# EAGLE board Fiação MR21 v5 (EAGLE 9.7.0)
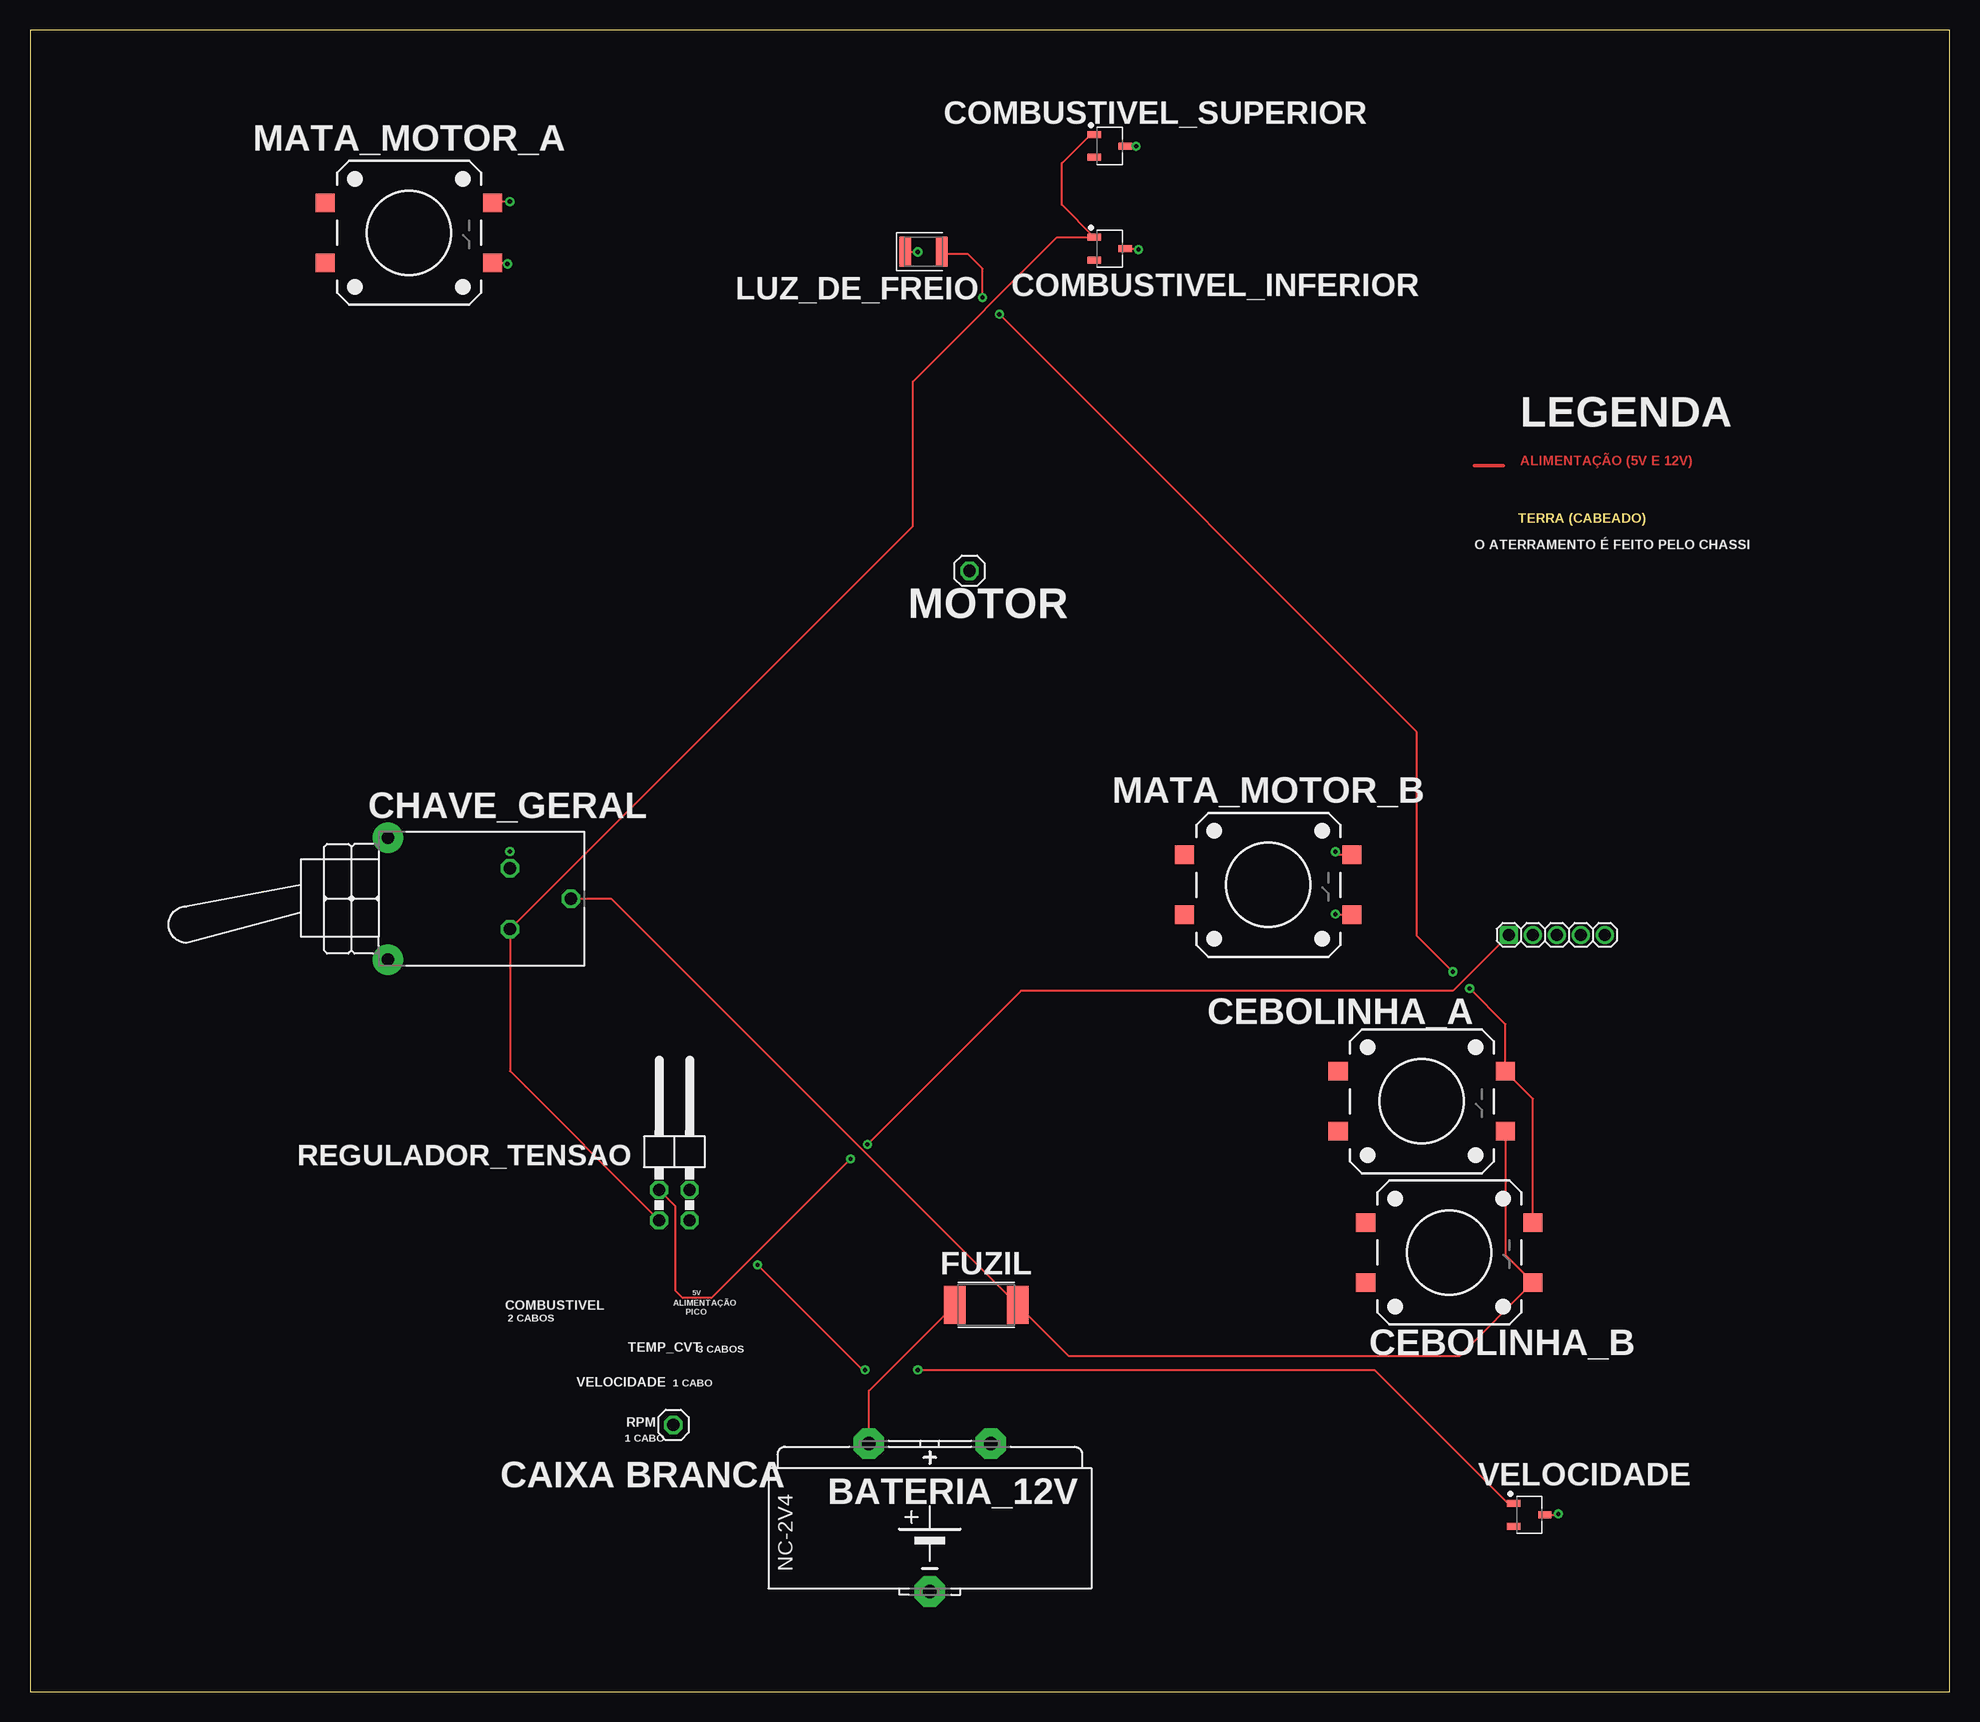
[diagram p0: board, top side]
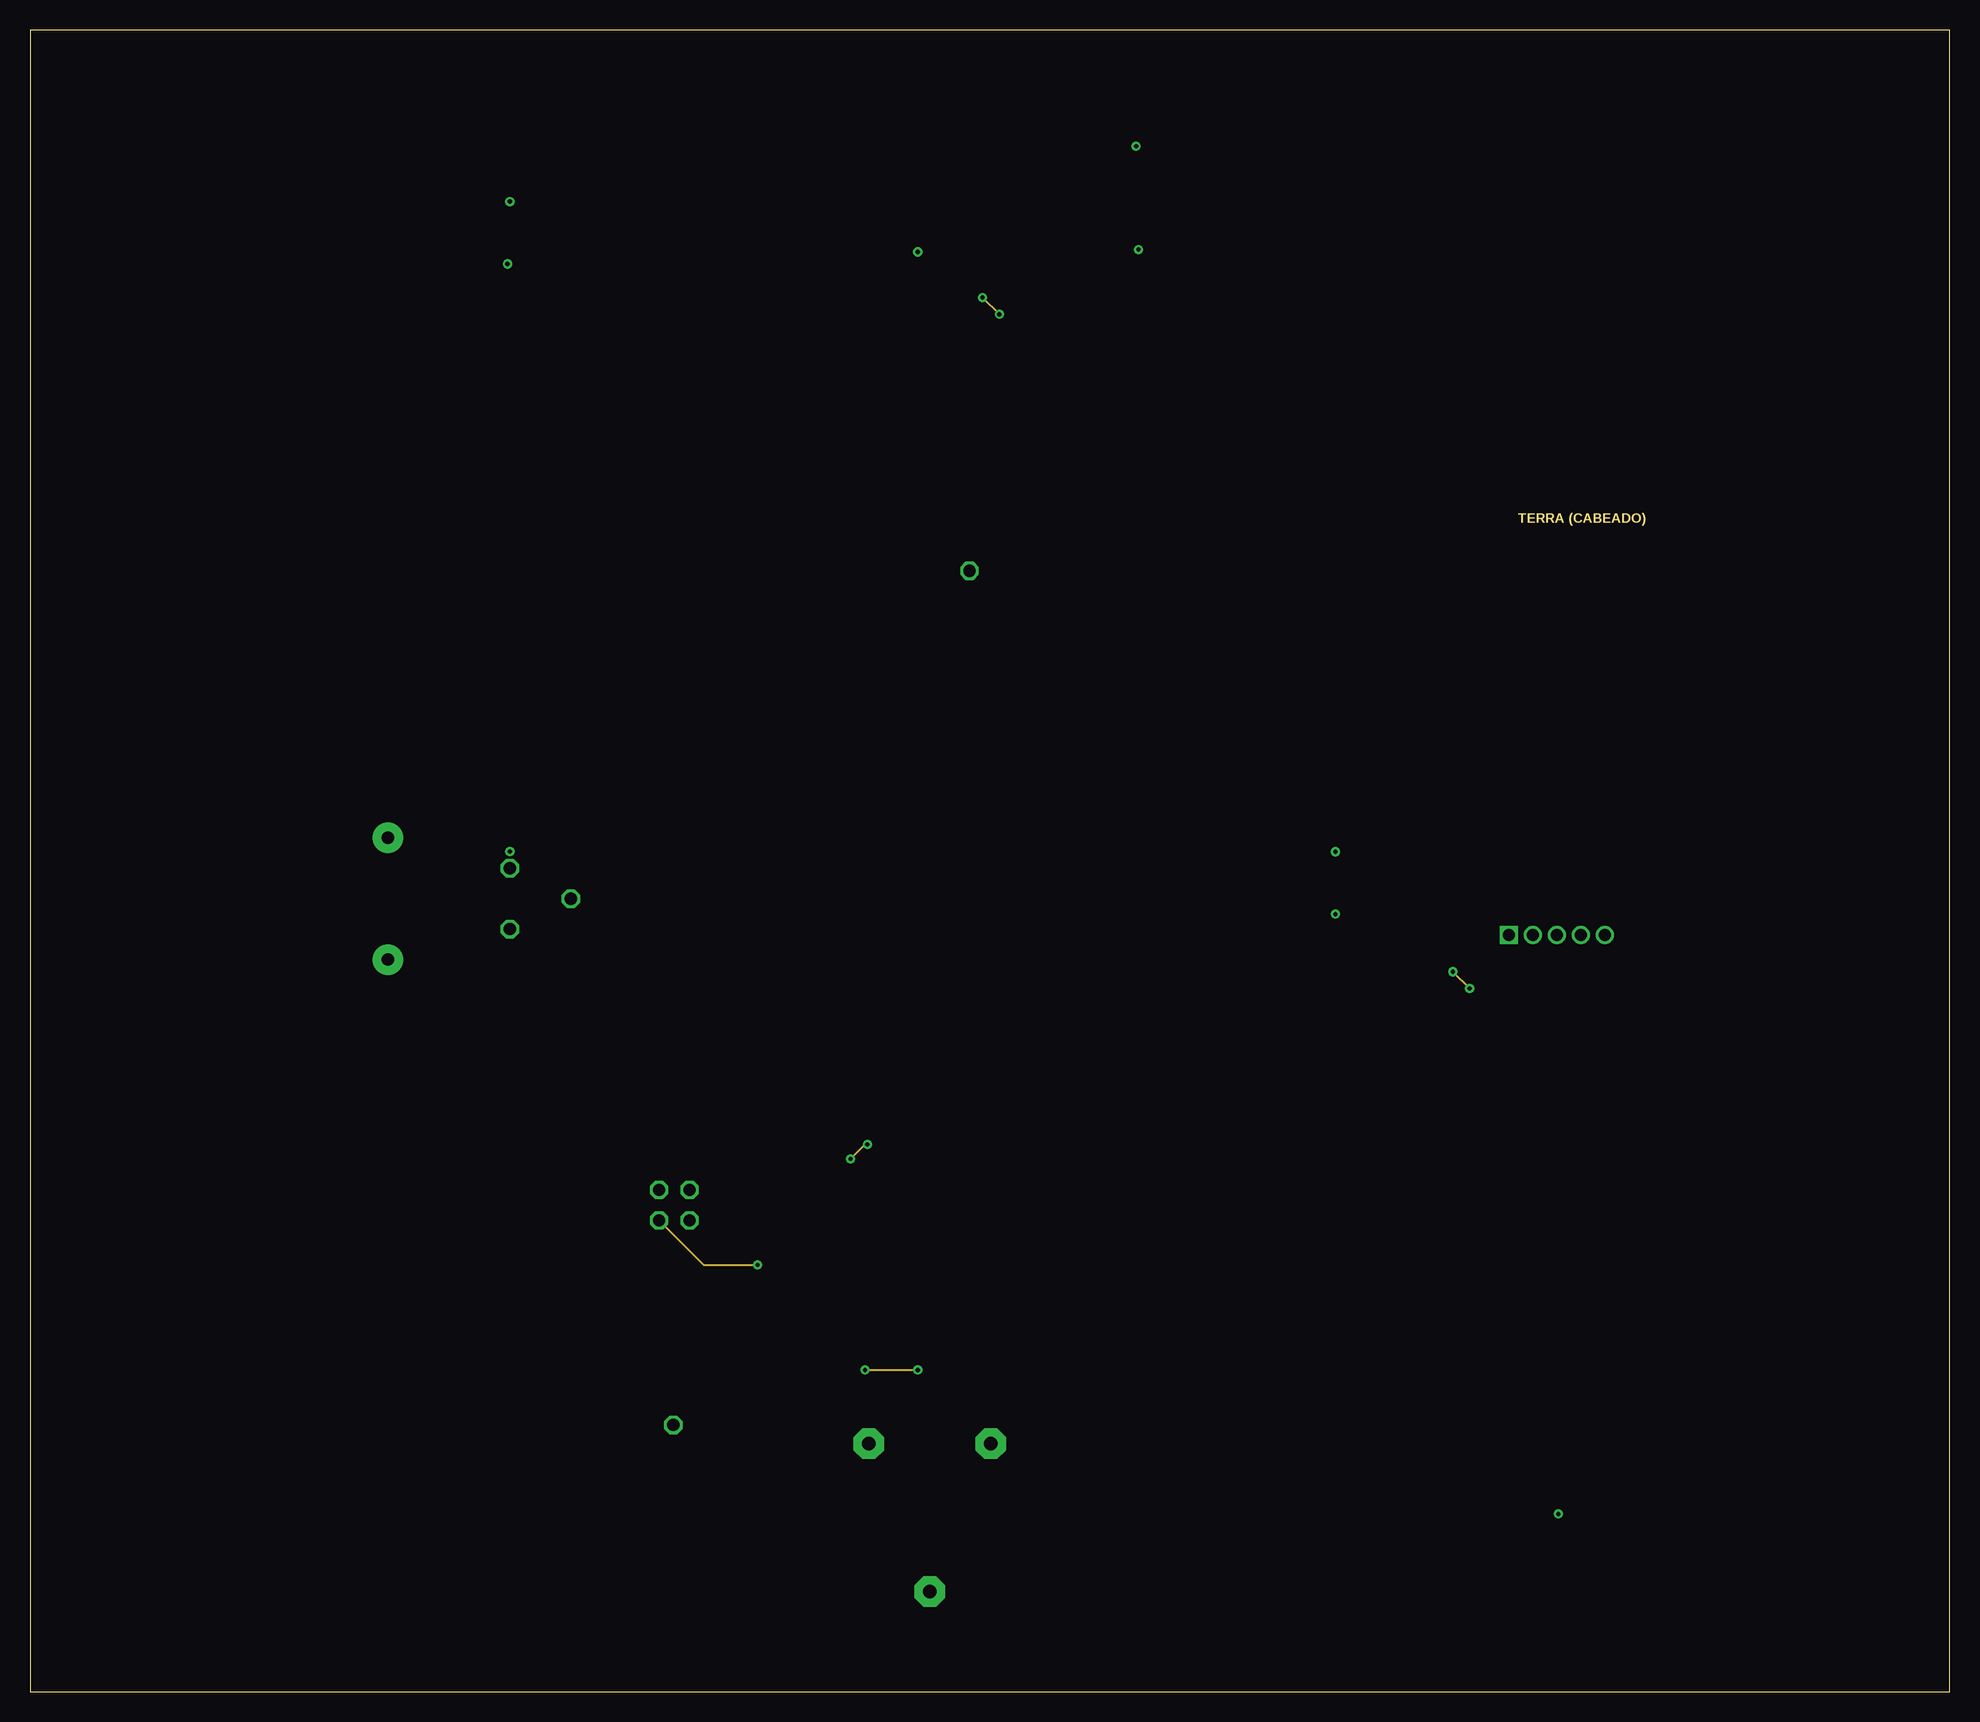
[diagram p1: board, inner layer Top2(Alimentação)]
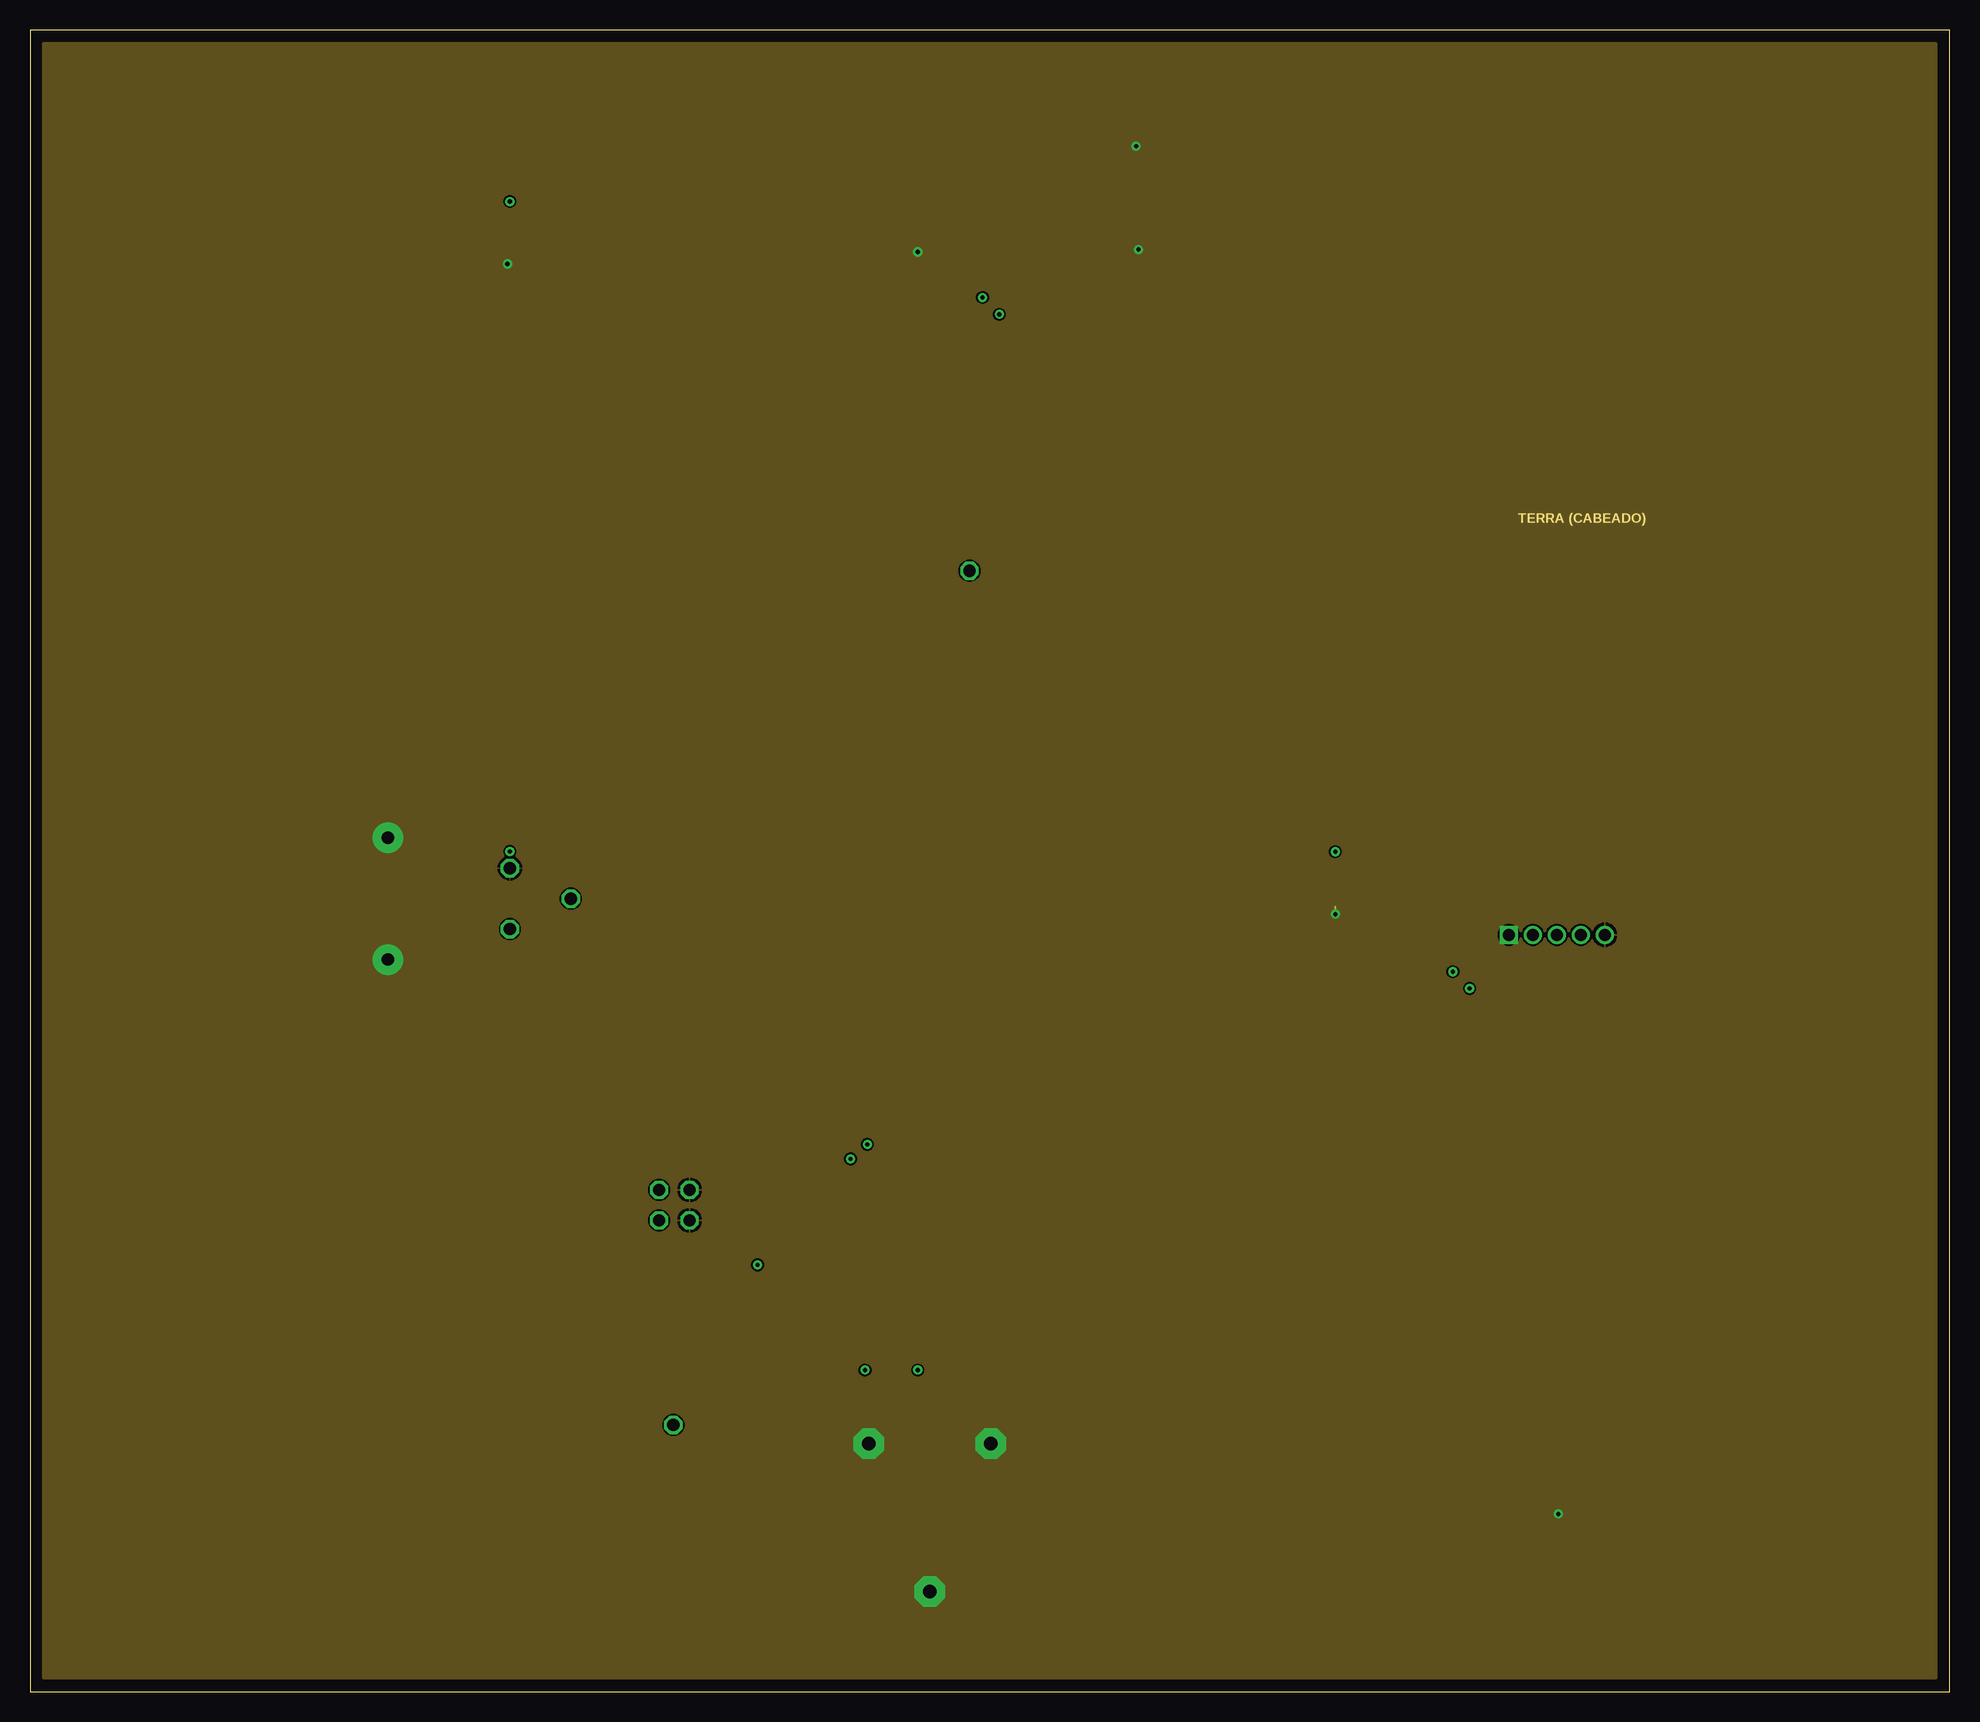
[diagram p2: board, inner layer GROUND-CHASSI]
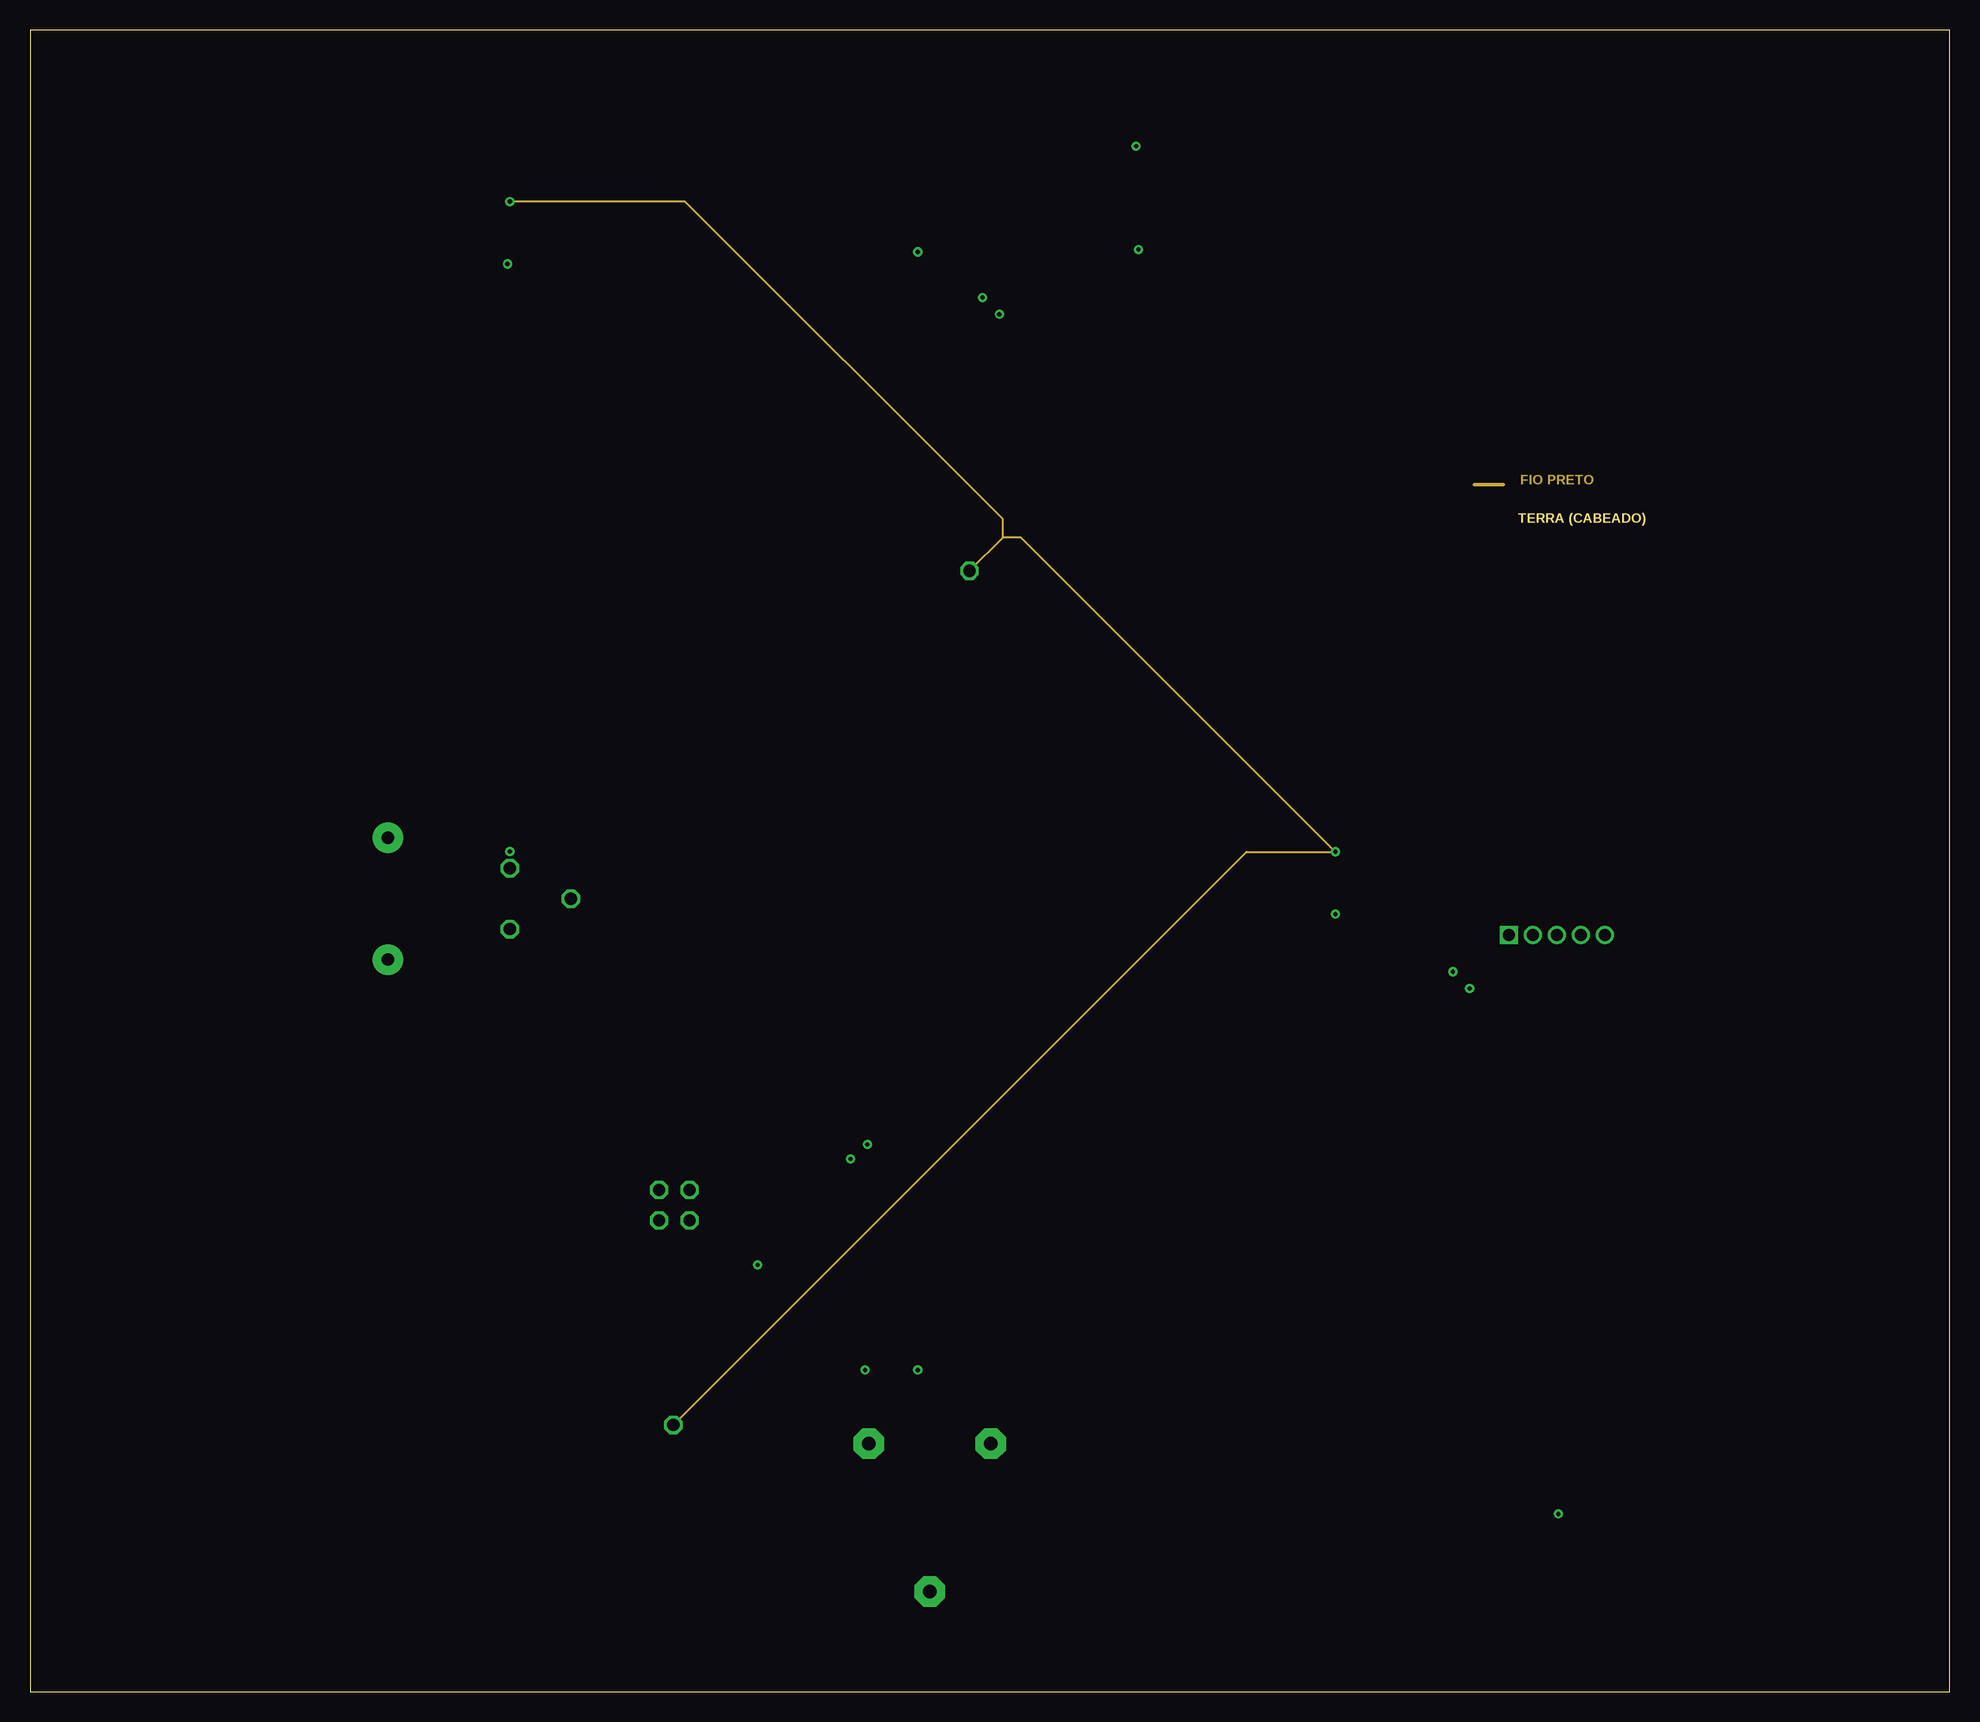
[diagram p3: board, inner layer FIO_PRETO]
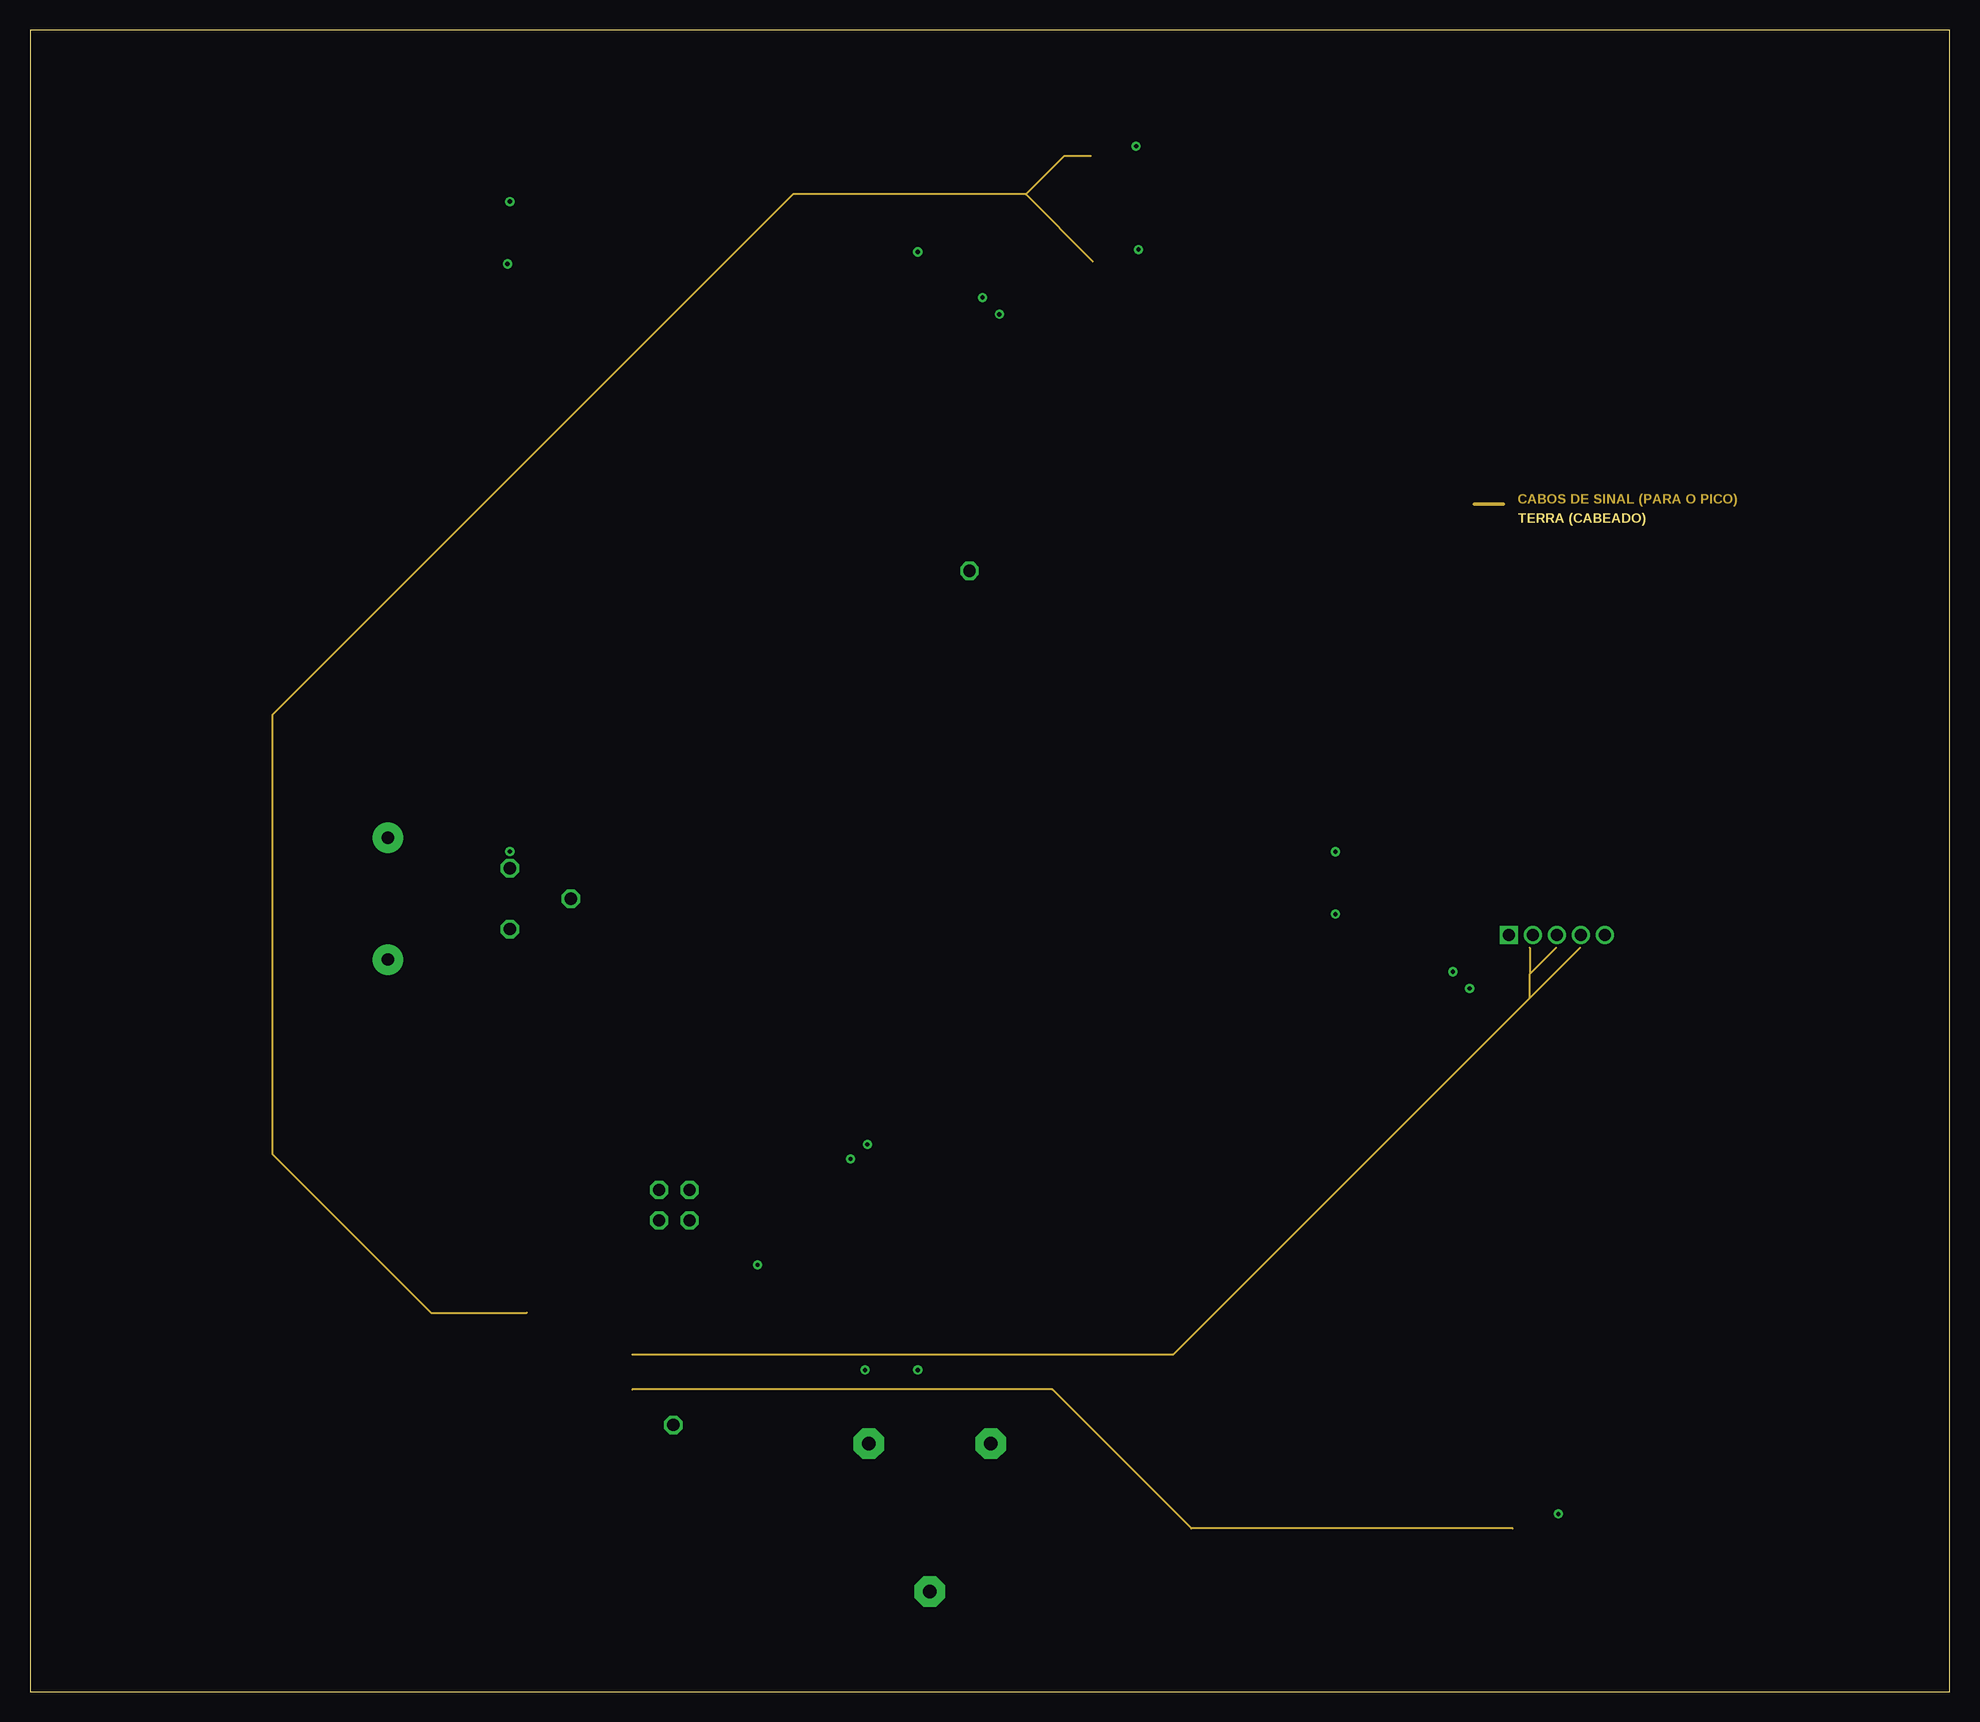
[diagram p4: board, inner layer Cabos]
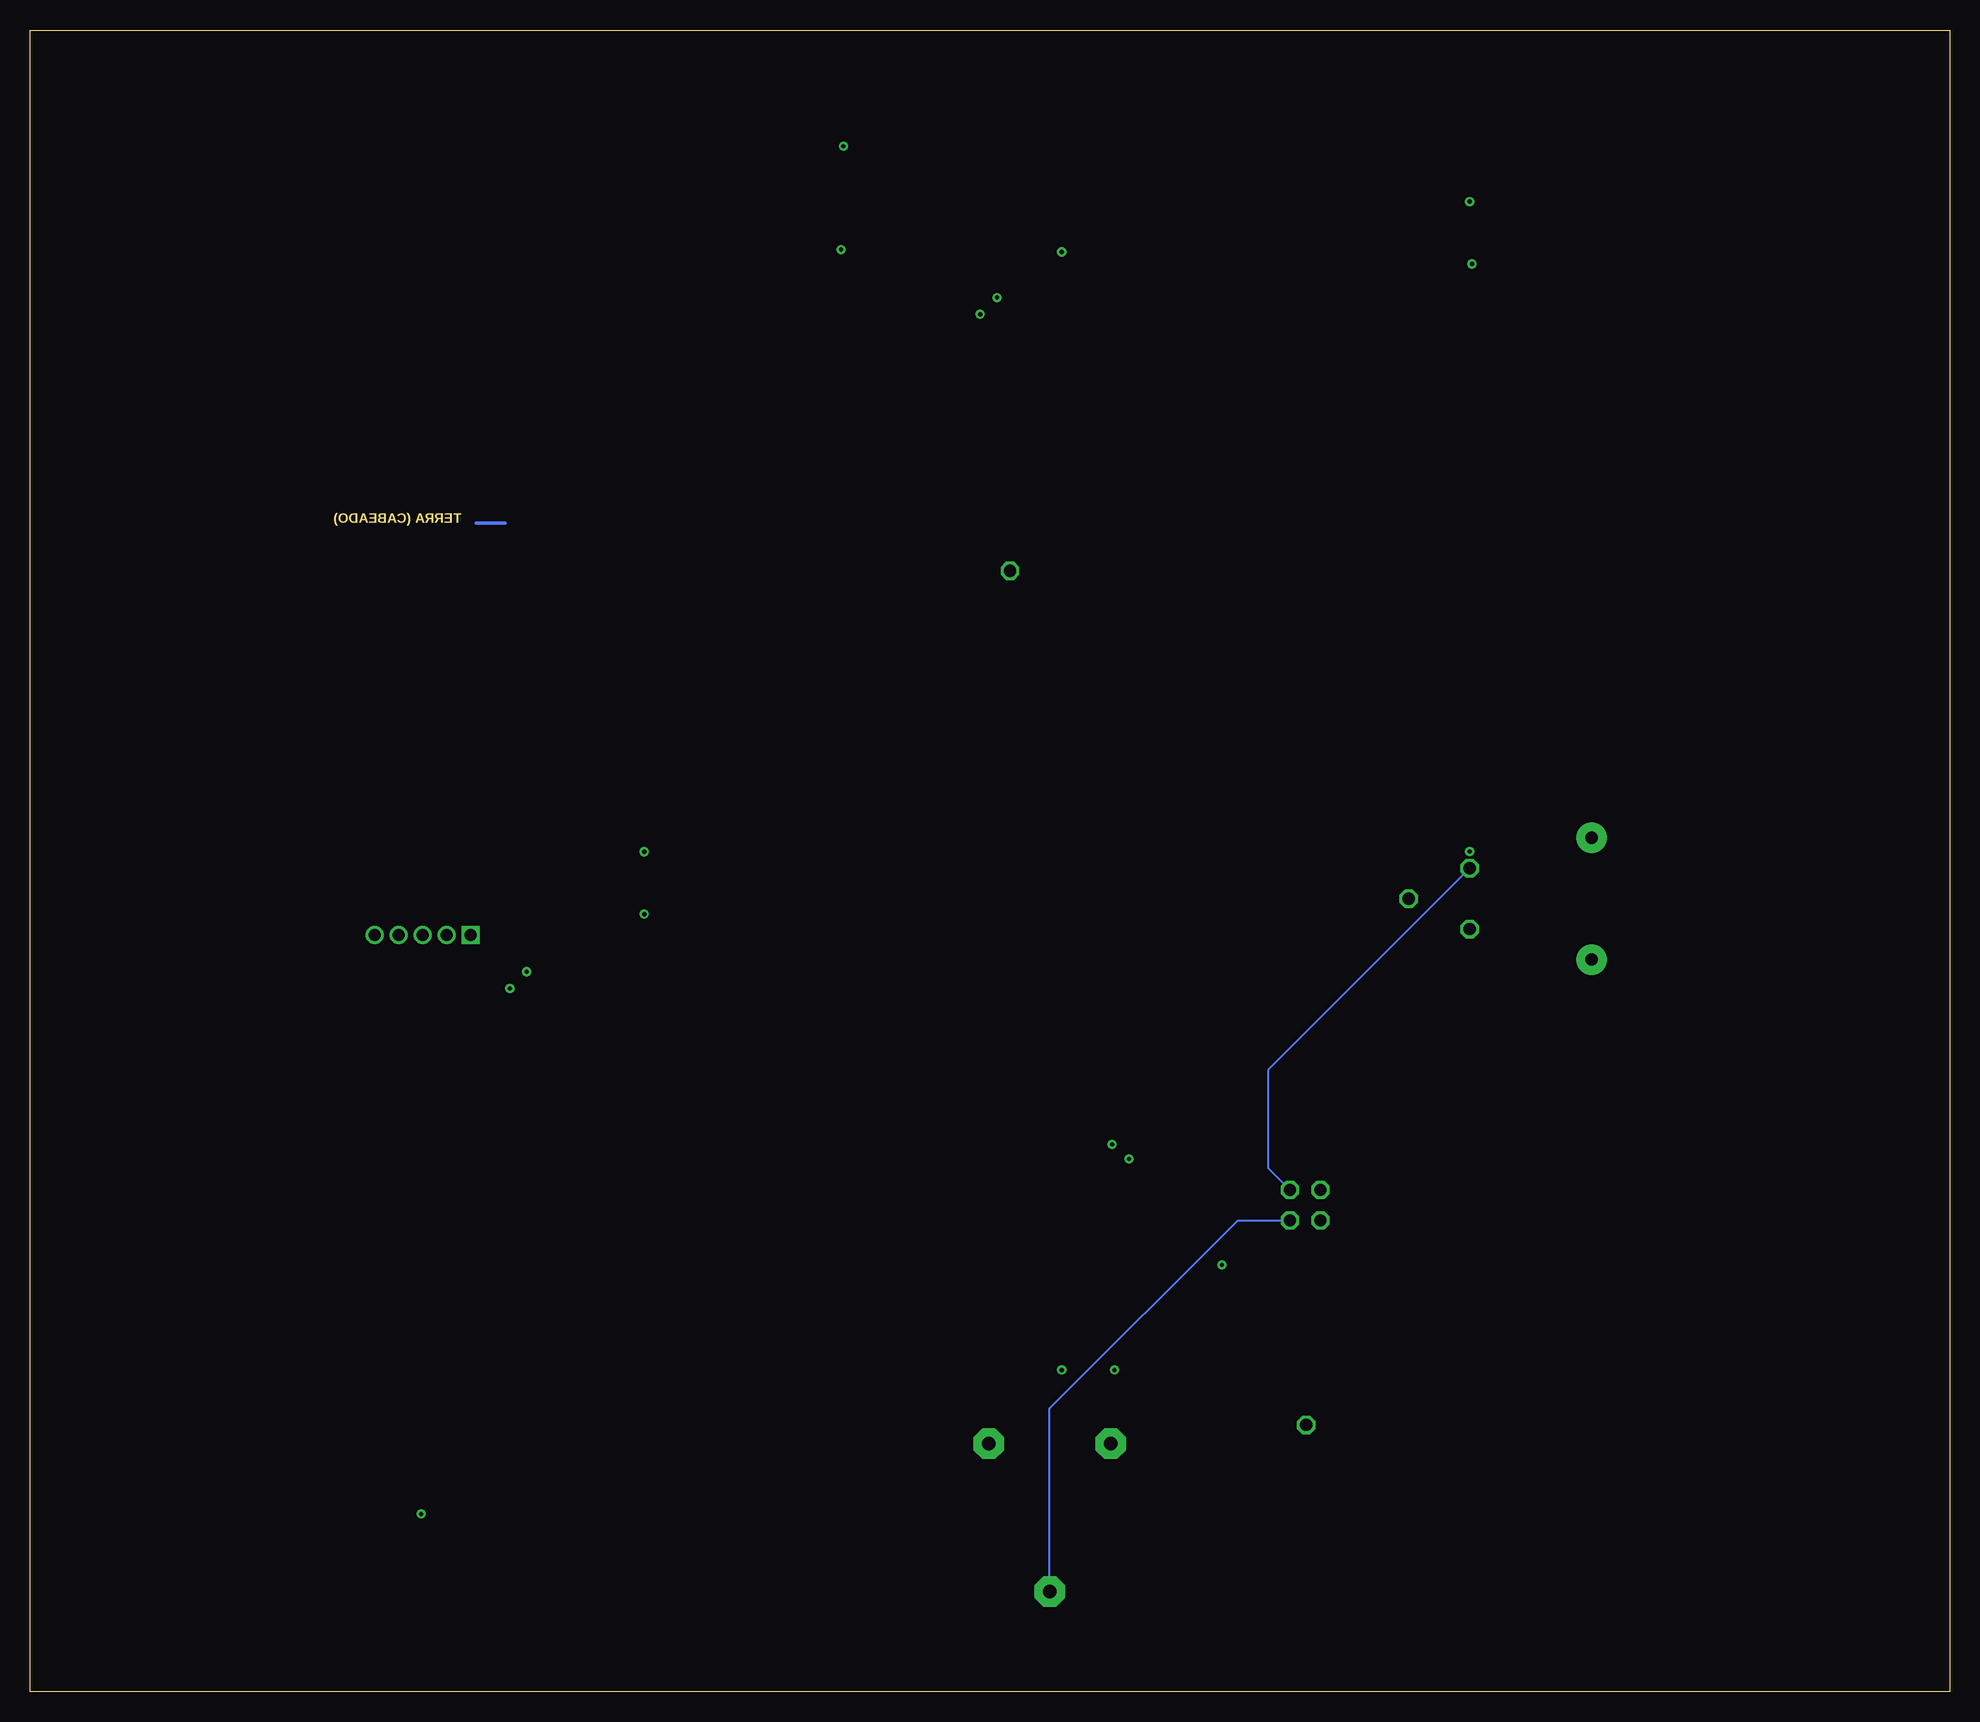
[diagram p5: board, bottom side, seen from below]

Size 160 x 138.5 mm. Coordinates in mm from the lower left corner, seen from the top.
Outline: 0,0 160,0 160,138.5 0,138.5 0,0
Copper layers (1+2+3*14+15+16): Top / Top2(Alimentação) / GROUND-CHASSI / FIO_PRETO / Cabos / Bottom
Stack-up Default Layer Stack: Top User Defined 0.035mm / Dielectric-2 User Defined 1.5mm / Top2(Alimentação) CuFoil:007 0.035mm / Dielectric-4 User Defined 1.5mm / GROUND-CHASSI CuFoil:007 0.035mm / Dielectric-1 User Defined 1.5mm / FIO_PRETO CuFoil:007 0.035mm / Dielectric-5 User Defined 1.5mm / Cabos CuFoil:007 0.035mm / Dielectric-3 User Defined 1.5mm / Bottom User Defined 0.035mm
Design rules "default *": minimum track width 6mil, minimum drill 0.35mm, track to track 6mil, track to pad 6mil, pad to pad 6mil, via to via 6mil, smd to smd 6mil, copper to edge 40mil, drill to drill 6mil, minimum pad ring 10mil, minimum via ring 8mil, stop-mask expansion 4mil, vias tented up to drill 0mil, thermal gap 10mil

## Footprints (pad centres in the part's own frame; a part is rotated, then mirrored left to right if it is on the bottom)
2V110R = drill 1.118 pad 2.54 octagon: + -5.08,-5.08; +@1 -5.08,5.08; - 7.239,0
TACTILE_SWITCH_SMD_12MM = smd 1.6 x 1.55: 1 6.975,-2.5; 2 -6.975,-2.5; 3 6.975,2.5; 4 -6.975,2.5
316-917 = drill 1.016 octagon: 1 10.16,2.54; 2 15.24,0; 3 10.16,-2.54 | drill 1.016 pad 2.54: B 0,-5.08; B1 0,5.08
SOT95P285X113-3N = smd 1.12 x 0.589: 1 -1.3,0.95; 2 -1.3,-0.95; 3 1.3,0
FUSC4532X125 = smd 1.78 x 3.15: 1 -2.615,0; 2 2.615,0
LEDC3224X250N_RND-R = smd 0.962 x 2.512: A 1.525,0; C -1.525,0
1_05X2MM = drill 1.016 pad 1.3 square: 1 -4,0 | drill 1.016 pad 1.3: 2 -2,0; 3 0,0; 4 2,0; 5 4,0
1X01 = drill 1.016 octagon: 1 0,0
2X02/90 = drill 1.016 octagon: 1 -1.27,-6.35; 2 -1.27,-3.81; 3 1.27,-6.35; 4 1.27,-3.81

## Placement (x,y rotation side)
BATERIA_12V  12V  [2V110R]  75.01,15.57 270 top
CEBOLINHA_A  NORMAL_ABERTO  [TACTILE_SWITCH_SMD_12MM]  116.01,49.2 0 top
CEBOLINHA_B  NORMAL_ABERTO  [TACTILE_SWITCH_SMD_12MM]  118.3,36.6 0 top
CHAVE_GERAL  [316-917]  29.84,66.09 0 top
COMBUSTIVEL_INFERIOR  NORMAL_FECHADO  [SOT95P285X113-3N]  90,120.27 0 top
COMBUSTIVEL_SUPERIOR  NORMAL_FECHADO  [SOT95P285X113-3N]  90,128.83 0 top
FUZIL  1A  [FUSC4532X125]  79.71,32.23 0 top
LUZ_DE_FREIO  [LEDC3224X250N_RND-R]  74.48,120.02 0 top
MATA_MOTOR_A  NORMAL_ABERTO  [TACTILE_SWITCH_SMD_12MM]  31.59,121.6 0 top
MATA_MOTOR_B  NORMAL_ABERTO  [TACTILE_SWITCH_SMD_12MM]  103.21,67.24 0 top
MAX6675  MOD_TERMOPAR  [1_05X2MM]  127.27,63.07 0 top
MOTOR  [1X01]  78.31,93.42 0 top
REGULADOR_TENSAO  12V-5V  [2X02/90]  53.71,45.62 0 top
RPM  [1X01]  53.63,22.22 0 top
VELOCIDADE  [SOT95P285X113-3N]  124.97,14.73 0 top

## Library data of the parts
BATERIA_12V = battery
CEBOLINHA_A CEBOLINHA_B MATA_MOTOR_A MATA_MOTOR_B = SparkFun-Switches; PROD_ID: SWCH-11967; SF_SKU: COM-12993
CHAVE_GERAL = switch
COMBUSTIVEL_INFERIOR COMBUSTIVEL_SUPERIOR VELOCIDADE = Sensor; CATEGORY: Sensor; MANUFACTURER: Allegro microsystems; MPN: A1324LLHLT-T; OPERATING_TEMP: -40 to 150 °C; PART_STATUS: Active; ROHS_COMPLIANT: RoHS3 Compliant; SUB-CATEGORY: Magnetic
FUZIL = Fuse; CATEGORY: FUSE; DESCRIPTION: Resettable PTCs; MANUFACTURER: Littlefuse; MPN: 1812L010; OPERATING_TEMPERATURE: -40°C to +85°C; PART_STATUS: ACTIVE; ROHS_COMPLIANCE: RoHS Compliant; SERIES: 1812L; SUBCATEGORY: Resettable; TYPE: PTC
LUZ_DE_FREIO = LED; CATEGORY: LED; COLOR: RED; DESCRIPTION: CHIP LED ROUND; SUB-CATEGORY: CHIP; TYPE: ROUND_TOP
MAX6675 MOTOR REGULADOR_TENSAO RPM = Connector; CATEGORY: CONNECTOR; SUB-CATEGORY: PIN-HEADER

## Nets
+5V: MAX6675.1 REGULADOR_TENSAO.2
+12V: CEBOLINHA_A.1 CEBOLINHA_B.1 CHAVE_GERAL.2 FUZIL.2
COMB_INF: COMBUSTIVEL_INFERIOR.2
COMB_SUP: COMBUSTIVEL_SUPERIOR.2
CVT_CS: MAX6675.3
CVT_SCK: MAX6675.4
CVT_SO: MAX6675.2
FIO_PRETO: MATA_MOTOR_A.3 MATA_MOTOR_B.3 MOTOR.1 RPM.1
GND: BATERIA_12V.- CHAVE_GERAL.1 COMBUSTIVEL_INFERIOR.3 COMBUSTIVEL_SUPERIOR.3 LUZ_DE_FREIO.C MATA_MOTOR_A.1 MATA_MOTOR_B.1 MAX6675.5 REGULADOR_TENSAO.3 REGULADOR_TENSAO.4 VELOCIDADE.3
N$1: CEBOLINHA_A.3 CEBOLINHA_B.3 LUZ_DE_FREIO.A
N$2: BATERIA_12V.+ FUZIL.1
SAIDA_CG: CHAVE_GERAL.3 COMBUSTIVEL_INFERIOR.1 COMBUSTIVEL_SUPERIOR.1 REGULADOR_TENSAO.1 VELOCIDADE.1
VELOCIDADE: VELOCIDADE.2

## Tracks (layer width: path | path; a pad name or v marks a point on that pad's centre or on a via)
+5V  (via drill 0.35 pad 0.6)
  Top 0.152: MAX6675.1 118.6,58.4 82.6,58.4 v69.8,45.6 | v68.4,44.4 56.8,32.8 54.4,32.8 53.8,33.4 53.8,40.45 REGULADOR_TENSAO.2
  Top2(Alimentação) 0.152: v69.8,45.6 69.6,45.6 v68.4,44.4
+12V
  Top 0.152: CHAVE_GERAL.2 48.45,66.09 69.55,44.99 69.56,44.99 FUZIL.2 86.56,28 119.17,28 CEBOLINHA_B.1 | CEBOLINHA_B.1 125.4,34.23 | CEBOLINHA_A.1 122.98,36.39 CEBOLINHA_B.1
FIO_PRETO  (via drill 0.35 pad 0.6)
  Top 0.152: MATA_MOTOR_B.3 109.06,69.74 v108.8,70 | v40,124.2 38.66,124.2 MATA_MOTOR_A.3
  FIO_PRETO 0.152: RPM.1 101.41,70 v108.8,70 82.6,96.2 81.09,96.2 | v40,124.2 54.6,124.2 81.09,97.71 81.09,96.2 | MOTOR.1 81.09,96.2
GND  (via drill 0.35 pad 0.6)
  Top 0.152: MATA_MOTOR_B.1 108.8,64.74 v108.8,64.8 | MATA_MOTOR_A.1 39.8,119.1 v39.8,119 | COMBUSTIVEL_INFERIOR.3 92.4,120.27 v92.4,120.2 | LUZ_DE_FREIO.C 74,120.02 v74,120 | COMBUSTIVEL_SUPERIOR.3 92.2,128.83 v92.2,128.8 | VELOCIDADE.3 127.4,14.73 v127.4,14.8
  GROUND-CHASSI 0.152: v108.8,64.8 108.8,65.4
  Bottom 0.152: REGULADOR_TENSAO.4 56.78,43.61 56.78,51.85 CHAVE_GERAL.1 | BATERIA_12V.- 75.01,23.59 59.33,39.27 REGULADOR_TENSAO.3
  pour GROUND-CHASSI: 163.8,141 163.8,-2 -4.2,-2 -4.2,141
N$1  (via drill 0.35)
  Top 0.152: CEBOLINHA_B.3 125.28,49.41 CEBOLINHA_A.3 122.98,55.62 v120,58.6 | 76.42,119.6 76.21,119.81 | 76.21,119.81 LUZ_DE_FREIO.A | v118.6,60 115.6,63 115.6,80 v80.8,114.8 | v79.4,116.2 79.4,118.6 78.19,119.81 76.21,119.81
  Top2(Alimentação) 0.152: v120,58.6 v118.6,60 | v80.8,114.8 v79.4,116.2
N$2
  Top 0.152: BATERIA_12V.+ 69.93,25.07 FUZIL.1
N$3
  Cabos 0.152: 88.6,119.2 83,124.8 | 88.4,128 86.2,128 83,124.8 | 83,124.8 63.6,124.8 20.2,81.4 20.2,44.8 33.42,31.58 41.4,31.58
N$4
  Top 0.305: 120.4,102.2 122.8,102.2
N$5  (via drill 0.35 pad 0.6)
  other vias: 40,70.02
N$7
  FIO_PRETO 0.305: 120.4,100.6 122.8,100.6
N$8
  Cabos 0.305: 120.4,99 122.8,99
N$9
  Bottom 0.305: 120.4,97.4 122.8,97.4
RPM
  Cabos 0.152: 123.6,13.6 96.8,13.6 85.22,25.18 50.2,25.18
SAIDA_CG  (via drill 0.35)
  Top 0.152: REGULADOR_TENSAO.1 40,51.71 CHAVE_GERAL.3 73.6,97.15 73.6,109.2 85.62,121.22 COMBUSTIVEL_INFERIOR.1 86,123.92 86,127.4 88.38,129.78 COMBUSTIVEL_SUPERIOR.1 | VELOCIDADE.1 123.2,15.68 112.08,26.8 v74,26.8 | v60.65,35.55 69.4,26.8 v69.6,26.8
  Top2(Alimentação) 0.152: REGULADOR_TENSAO.1 56.16,35.55 v60.65,35.55 | v69.6,26.8 v74,26.8
TEMP_CVT
  Cabos 0.152: 125,62 125,59.8 | 127.2,62 125,59.8 | 129.2,62 125,57.8 | 125,57.8 125,59.8 | 125,57.8 95.28,28.08 50.2,28.08

## Text on the board
Top: ALIMENTAÇÃO (5V E 12V)
FIO_PRETO: FIO PRETO
Cabos: CABOS DE SINAL (PARA O PICO)
tNames: LEGENDA | O ATERRAMENTO É FEITO PELO CHASSI | 5V | COMBUSTIVEL | 2 CABOS | ALIMENTAÇÃO / PICO | TEMP_CVT | 3 CABOS | VELOCIDADE | 1 CABO | 1 CABO | CAIXA BRANCA
Milling: TERRA (CABEADO)